# EAGLE board resistor (EAGLE 6.5.0)
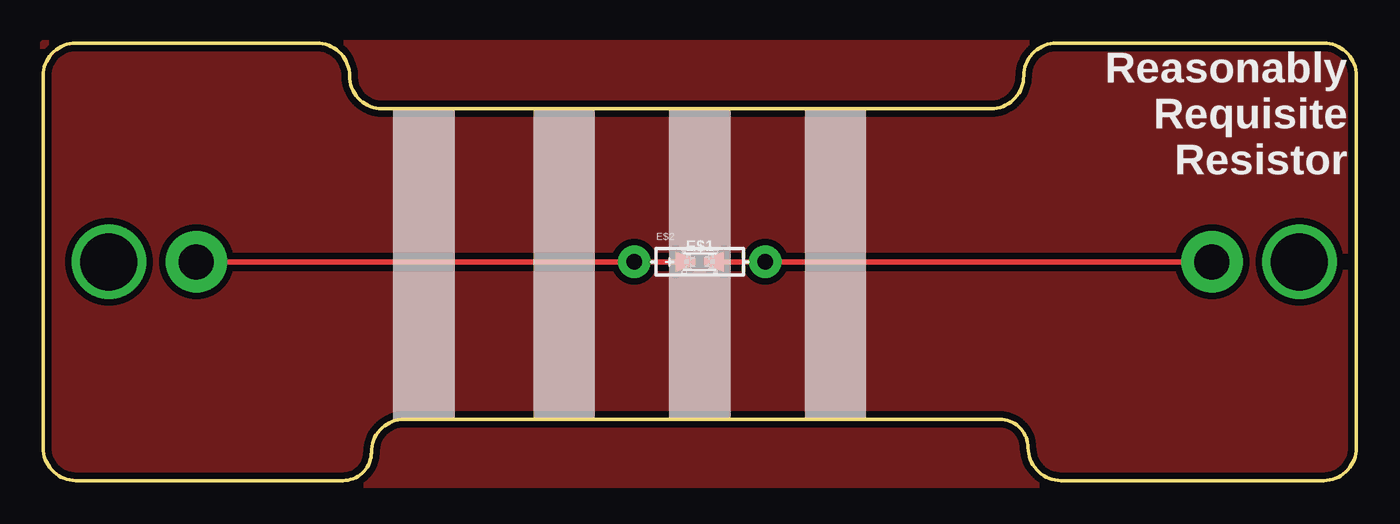
[diagram p0: board, top side]
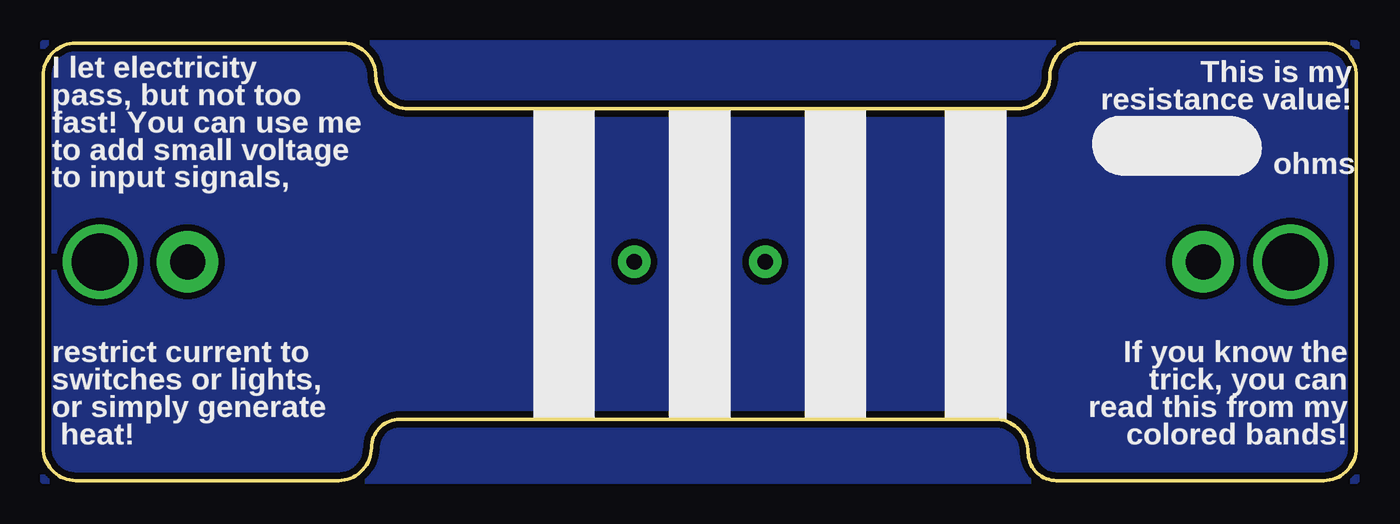
[diagram p1: board, bottom side, seen from below]

Size 76.2 x 25.4 mm. Coordinates in mm from the lower left corner, seen from the top.
Outline: 55.5,3.56 20.95,3.56 arc90 19.05,1.65 arc-90 17.4,0 1.91,0 arc-90 0,1.91 0,23.5 arc-90 1.91,25.4 15.88,25.4 arc-90 17.78,23.5 arc90 19.68,21.59 54.99,21.59 arc90 56.9,23.5 arc-90 58.8,25.4 74.3,25.4 arc-90 76.2,23.5 76.2,1.91 arc-90 74.3,0 59.05,0 arc-90 57.15,1.91 arc90 55.5,3.56
Copper layers (1*16): Top 0.035mm / dielectric 1.5mm / Bottom 0.035mm
Design rules "default *": minimum track width 10mil, minimum drill 0.6mm, track to track 8mil, track to pad 8mil, pad to pad 8mil, via to via 8mil, smd to smd 8mil, copper to edge 15mil, drill to drill 8mil, minimum pad ring 10mil, minimum via ring 8mil, stop-mask expansion 4mil, vias tented up to drill 0mil, thermal gap 10mil

## Footprints (pad centres in the part's own frame; a part is rotated, then mirrored left to right if it is on the bottom)
0402-0603-0805-UNIVERSAL = smd 0.254 x 0.254: + -0.762,0; - 0.762,0
AXIAL-0.3 = drill 0.9 pad 1.88: P$1 -3.81,0; P$2 3.81,0

## Placement (x,y rotation side)
E$1  [0402-0603-0805-UNIVERSAL]  38.1,12.7 0 top
E$2  [AXIAL-0.3]  38.1,12.7 0 top

## Library data of the parts
E$1 E$2 = tekdemo

## Tracks (layer width: path | path; a pad name or v marks a point on that pad's centre or on a via)
S$1  (via drill 3.3)
  other vias: 3.81,12.7
S$2  (via drill 3.3)
  other vias: 72.9,12.7
S$3  (via drill 2.03 pad 3.56)
  Top 0.305: v8.89,12.7 37.21,12.7
S$4  (via drill 2.03 pad 3.56)
  Top 0.305: v67.82,12.7 39.12,12.7
S$5
  pour Top (isolate 0.381): 0,25.4 0,1.78 arc90 1.78,-0.25 74.93,-0.25 arc90 76.2,1.27 76.2,23.62 arc90 74.42,25.4
S$6
  pour Bottom (isolate 0.381): 0,0 0,25.4 76.2,25.4 76.2,0

## Text on the board
tPlace: Reasonably / Requisite / Resistor
bPlace: I let electricity / pass, but not too / fast! You can use me / to add small voltage / to input signals, | This is my / resistance value! | ohms | If you know the / trick, you can / read this from my / colored bands! | restrict current to / switches or lights, / or simply generate / heat!